# Altium PCB Mainboard-mbed.PcbDoc
Units mm, origin at the board's own origin, x right, y up, seen from the top; angles counter-clockwise.
Board outline 85 x 50 mm, 2 copper layers (Top Layer, Bottom Layer); 88 components, 113 nets, 414 pads, 292 vias.
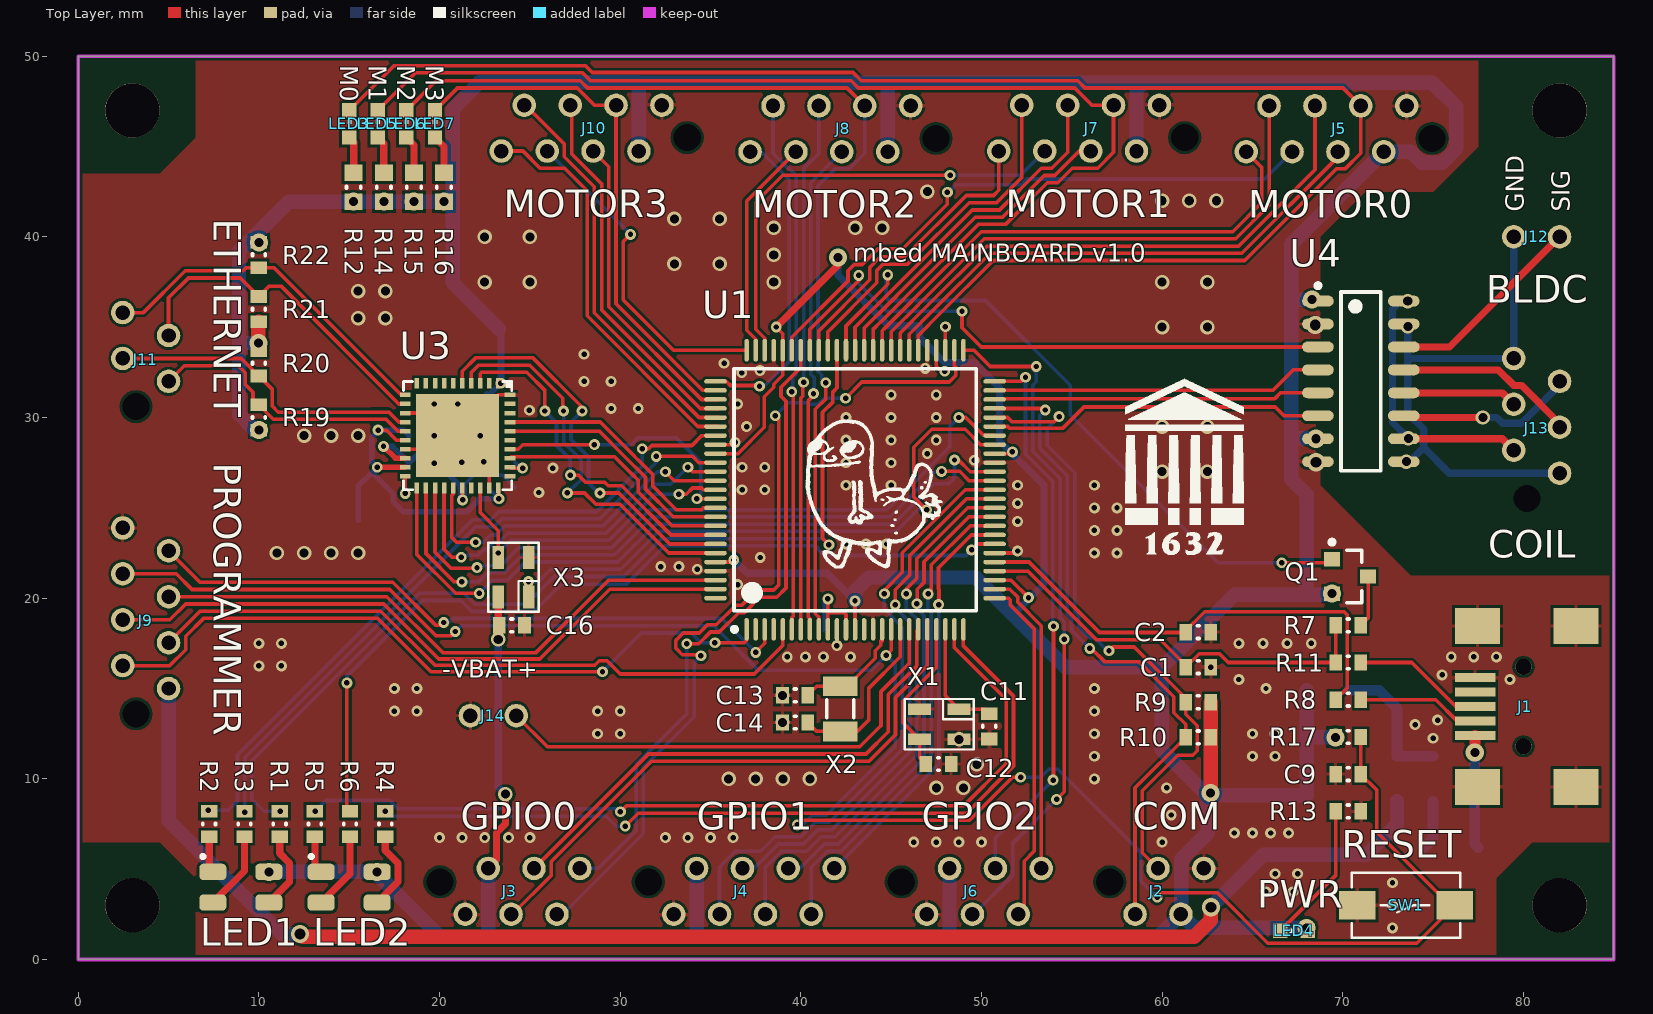
[diagram p0: Top Layer view]
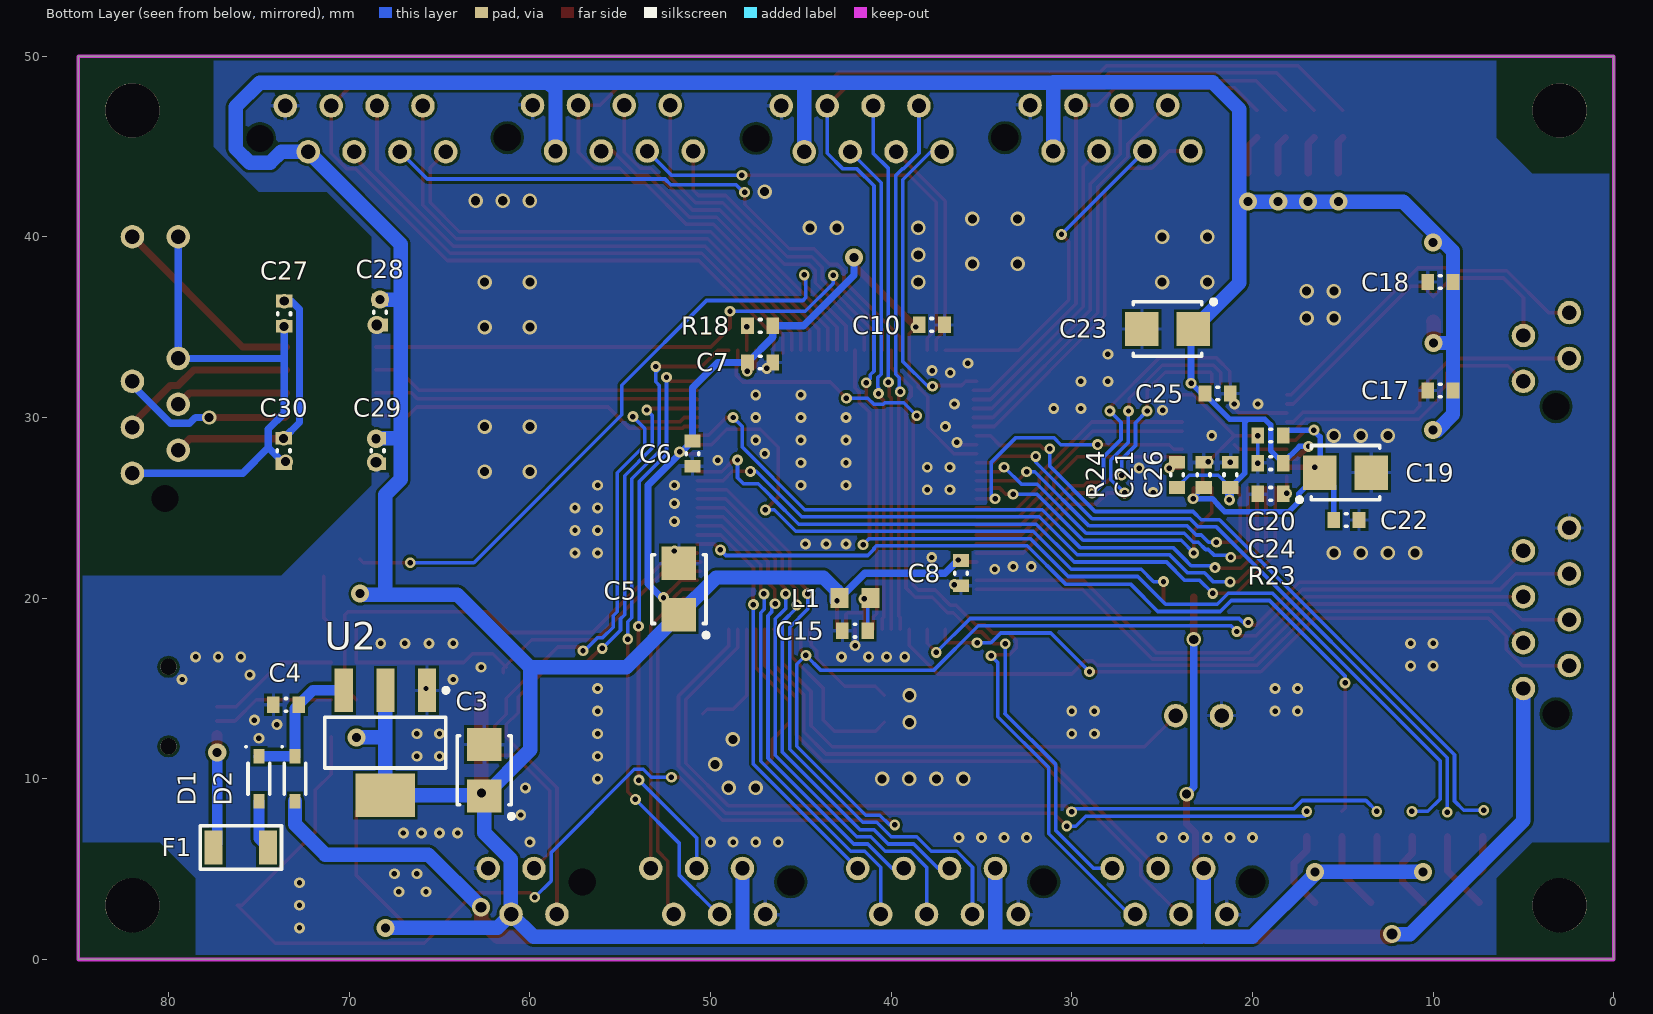
[diagram p1: Bottom Layer view, seen from below]

## Layer stack, top to bottom
Top Solder: solder mask 0.0102, Solder Resist, Dk 3.5
Top Layer: signal copper 0.0356
Dielectric1: dielectric 0.32, FR-4, Dk 4.8
Bottom Layer: signal copper 0.0356
Bottom Solder: solder mask 0.0102, Solder Resist, Dk 3.5

## Board outline
0,0 0,50 85,50 85,0

## Design rules (kind name [scope] priority, off if disabled: settings)
BoardOutlineClearance [All] p1: gap=0.2
Clearance [All] p1: gap=0.153
ComponentClearance [All] p1: gap=0.1 collisioncheckmode=3 verticalgap=0.1 showdistances=FALSE
FabricationTestPointUsage TestPointUsage [All] p1: valid=0 allowmultiple=FALSE
FabricationTestpoint Testpoint [All] p1: side=3 testpointundercomponent=TRUE minsize=1.016 maxsize=2.54 preferedsize=1.524 minholesize=0 maxholesize=1.016 preferedholesize=0.813 testpointgrid=0.025 allowsidetop=TRUE allowsidebottom=TRUE usegrid=TRUE gridtolerance=0
HoleSize [All] p1: absolutevalues=TRUE maxlimit=2.54 minlimit=0.3 maxpercent=80.000 minpercent=20.000
MinimumAnnularRing [All] p1: minimumring=0.15
PlaneConnect [All] p1: planeconnectstyle=Relief reliefexpansion=0.2 reliefentries=4 reliefconductorwidth=0.2 reliefairgap=0.15
PolygonConnect PolygonConnect_Vias [All vs IsVia] p1: connectstyle=Direct reliefconductorwidth=0.254 reliefentries=4 polygonreliefangle="90 Angle" airgapwidth=0.254
PolygonConnect [All] p2: connectstyle=Relief reliefconductorwidth=0.2 reliefentries=4 polygonreliefangle="90 Angle" airgapwidth=0.15
RoutingVias [All] p1: holewidth=0.4 width=0.7 viastyle="Through Hole" minholewidth=0.3 minwidth=0.6 maxholewidth=6.3 maxwidth=1.5
SilkToSilkClearance [All] p1: silktosilkclearance=0.2
SilkToSolderMaskClearance SilkscreenOverComponentPads [IsPad] p1: minsilkscreentomaskgap=0.254 clearancetoexposedcopper=TRUE
SolderMaskExpansion [All] p1: expansion=0.075
Width [All] p1: maxlimit=1 minlimit=0.152 preferedwidth=0.2 minimp=50.000000 maximp=50.000000 favimp=50.000000
23 further rules are at their usual default settings.

## Classes and differential pairs
component class CoilgunConnector: C27 C28 C29 C30 J12 J13 U4
component class Mainboard-mbed: C1 C2 C3 C4 C5 C6 C7 C8 C9 C10 C11 C12 C13 C14 C15 C? D1 D2 F1 J1 J2 J3 J4 J5 J6 J7 J8 J9 J10 J14 L1 LED1 LED2 LED3 LED4 LED5 LED6 LED7 Q1 R1 R2 R3 R4 R5 R6 R7 R8 R9 R10 R11 R12 R13 R14 R15 R16 R17 R18 SW1 U1 U2 X1 X2
component class U_Ethernet: C16 C17 C18 C19 C20 C21 C22 C23 C24 C25 C26 J11 R19 R20 R21 R22 R23 R24 U3 X3

## Components (designator, comment, footprint, x,y, rotation, side; value= is the part's Value field where it differs from the comment)
C1 "CAP0603" CAPC0603(1608)100_L 62,16.179 r0 top
C2 "CAP0603" CAPC0603(1608)100_L 62,18.118 r0 top
C3 "Tant 10uF" CAPMP3528X12N 62.525,10.475 r270 bottom
C4 "CAP0603" CAPC0603(1608)100_L 73.5,14.1 r180 bottom
C5 "Tant 10uF" CAPMP3528X12N 51.75,20.5 r270 bottom
C6 "100nF" CAPC0603(1608)100_L 51,28 r270 bottom
C7 "100nF" CAPC0603(1608)100_L 47.25,33.05 r180 bottom
C8 "100nF" CAPC0603(1608)100_L 36.135,21.385 r270 bottom
C9 "CAP0603" CAPC0603(1608)100_L 70.3,10.26 r180 top
C10 "100nF" CAPC0603(1608)100_L 37.75,35.13 r180 bottom
C11 "CAP0603" CAPC0603(1608)100_L 50.43,12.905 r270 top
C12 "CAP0603" CAPC0603(1608)100_L 47.62,10.825 r0 top
C13 "CAP0603" CAPC0603(1608)100_L 39.685,14.625 r180 top
C14 "CAP0603" CAPC0603(1608)100_L 39.685,13.125 r180 top
C15 "CAP0603" CAPC0603(1608)100_L 42,18.2 r180 bottom
C16 "100nF" CAPC0603(1608)100_L 24,18.5 r180 top
C17 "100nF" CAPC0603(1608)100_L 9.6,31.5 r180 bottom
C18 "100nF" CAPC0603(1608)100_L 9.6,37.5 r0 bottom
C19 "10uF Tant" CAPMP3528X12N 14.85,26.95 r0 bottom
C20 "100nF" CAPC0603(1608)100_L 19,29 r180 bottom
C21 "100nF" CAPC0603(1608)100_L 22.7,26.825 r90 bottom
C22 "100nF" CAPC0603(1608)100_L 14.8,24.325 r180 bottom
C23 "10uF Tant" CAPMP3528X12N 24.7,34.9 r180 bottom
C24 "100nF" CAPC0603(1608)100_L 19,27.475 r180 bottom
C25 "100nF" CAPC0603(1608)100_L 21.925,31.325 r0 bottom
C26 "100nF" CAPC0603(1608)100_L 21.225,26.825 r270 bottom
C27 "100nF" CAPC0603(1608)100_L 73.6,35.75 r90 bottom
C28 "100nF" CAPC0603(1608)100_L 68.3,35.825 r90 bottom
C29 "100nF" CAPC0603(1608)100_L 68.425,28.15 r270 bottom
C30 "100nF" CAPC0603(1608)100_L 73.625,28.15 r270 bottom
D1 "BAT60A" INF-SOD323_V 75,10 r180 bottom
D2 "BAT60A" INF-SOD323_V 73,10 r180 bottom
F1 "PTC-1206" PTC-1206 76,6.2 r180 bottom
J1 "USB-MINI-B" USB-B-MINI 80,14 r90 top
J2 "COM" MICRO-MATCH-4 58.5,2.5 r180 top
J3 "GPIO0" MICRO-MATCH-6 21.42,2.5 r180 top
J4 "GPIO1" MICRO-MATCH-8 32.96,2.5 r180 top
J5 "MOTOR0" MICRO-MATCH-8 73.54,47.25 r0 top
J6 "GPIO2" MICRO-MATCH-6 46.96,2.5 r180 top
J7 "MOTOR1" MICRO-MATCH-8 59.85,47.29 r0 top
J8 "MOTOR2" MICRO-MATCH-8 46.08,47.25 r0 top
J9 "PROGRAMMER" MICRO-MATCH-8 5,15 r270 top
J10 "MOTOR3" MICRO-MATCH-8 32.31,47.29 r0 top
J11 "ETHERNET" MICRO-MATCH-4 5,32 r270 top
J12 "BLDC" PIN-HEADER-2 79.46,40 r0 top
J13 "COIL" MICRO-MATCH-6 82,26.92 r270 top
J14 "-VBAT+" PIN-HEADER-2 24.25,13.5 r180 top
L1 "10uH" 0603 42,20 r0 bottom
LED1 "RGB-LED" RGB-LED 9,4 r0 top
LED2 "RGB-LED" RGB-LED 15,4 r0 top
LED3 "M0" CHIPLED_0603 15,46.25 r0 top
LED4 "PWR" CHIPLED_0603 67.3,1.6 r90 top
LED5 "M1" CHIPLED_0603 16.583,46.25 r0 top
LED6 "M2" CHIPLED_0603 18.167,46.25 r0 top
LED7 "M3" CHIPLED_0603 19.75,46.25 r0 top
Q1 "BSS84LT1G" ONSC-SOT-23-3-318-08_V 70.4,21.2 r0 top
R1 "100R" RESC0603(1608)_L 11.15,7.5 r90 top
R2 "470R" RESC0603(1608)_L 7.25,7.5 r270 top
R3 "100R" RESC0603(1608)_L 9.2,7.5 r90 top
R4 "100R" RESC0603(1608)_L 17,7.5 r90 top
R5 "470R" RESC0603(1608)_L 13.1,7.5 r270 top
R6 "100R" RESC0603(1608)_L 15.05,7.5 r90 top
R7 "RES0603" RESC0603(1608)_L 70.3,18.5 r0 top
R8 "RES0603" RESC0603(1608)_L 70.3,14.38 r0 top
R9 "10K" RESC0603(1608)_L 62,14.239 r0 top
R10 "10K" RESC0603(1608)_L 62,12.3 r0 top
R11 "RES0603" RESC0603(1608)_L 70.3,16.44 r0 top
R12 "470R" RESC0603(1608)_N 15.25,42.75 r90 top
R13 "470R" RESC0603(1608)_L 70.3,8.2 r0 top
R14 "470R" RESC0603(1608)_N 16.917,42.75 r90 top
R15 "470R" RESC0603(1608)_N 18.583,42.75 r90 top
R16 "470R" RESC0603(1608)_N 20.25,42.75 r90 top
R17 "RES0603" RESC0603(1608)_L 70.3,12.32 r180 top
R18 "RES0603" RESC0603(1608)_L 47.25,35.075 r180 bottom
R19 "49R9" RESC0603(1608)_L 10,30 r90 top
R20 "49R9" RESC0603(1608)_L 10,33 r90 top
R21 "49R9" RESC0603(1608)_L 10,36 r90 top
R22 "49R9" RESC0603(1608)_L 10,39 r90 top
R23 "4K87" RESC0603(1608)_L 19,25.775 r0 bottom
R24 "2K2" RESC0603(1608)_L 24.175,26.825 r90 bottom
SW1 "RESET" DTSM-32S-B 73.5,3 r180 top
U1 "LPC1768FBD100" SOT407-1_L 43,26 r90 top
U2 "LD1117S33CTR" SOT-223_N 68,12 r270 bottom
U3 "DP83848J" LLP-40 21,29 r0 top
U4 "Si8641BC-B-IS1" SLAB-SOIC-16-NB_L 71,32 r0 top
X1 "12MHz" 3.2X.2.5 47.665,13.02 r180 top
X2 "32.768kHz" FC135 42.185,13.875 r90 top
X3 "50MHz" 3.2X.2.5 24.088,21.158 r90 top

## Footprints (in the part's own frame and the unit in brackets; to place one, negate y for a bottom-side part, rotate by r counter-clockwise, add the part's x,y. Pads: shape width x height; smd on the part's side, far side on the other; paste and mask are expansions set on the pad)
3.2X.2.5 [mil]
  rect 50x25 smd: P$1(-43,-33) P$2(43,-33) P$3(43,33) P$4(-43,33)
  silkscreen extent -75,-55 75,55
0603 [mm]
  rect 1x1.1 smd: 1(-0.85,0) 2(0.85,0)
CAPC0603(1608)100_L [mm]
  rect 0.7x0.9 smd: 1(-0.7,0) 2(0.7,0)
  silkscreen extent -0.05,-0.35 0.05,0.35, body extent -0.87,-0.47 0.88,0.48, height 1
CAPMP3528X12N [mm] "Molded Capacitor, 2-Leads, Body 3,50x2,80mm, IPC Medium Density"
  rect 1.85x1.9 smd: 1(-1.425,0) 2(1.425,0)
  silkscreen extent -1.9,-1.5 2.67,1.62, body extent -2.07,-1.5 2.07,1.5, height 1.2
CHIPLED_0603 [mil]
  rect 31.5x31.5 smd: A(0,-29.53) C(0,29.53)
  silkscreen extent -5,0 5,10
DTSM-32S-B [mm]
  rect 2x1.6 smd: P$1(-2.7,0) P$2(2.7,0)
  silkscreen extent -3,-1.8 3,1.8
FC135 [mm]
  rect 1.1x1.9 smd: X1(-1.25,0) X2(1.25,0)
  silkscreen extent -0.5,-0.75 0.5,0.75
INF-SOD323_V [mm] "SOD, 2-Leads, Body 1.7x1.25 mm"
  rect 0.6x0.8 smd: 1(0,1.25) 2(0,-1.25)
  silkscreen extent -0.76,-0.85 0.6,1.83, body extent -0.63,-0.85 0.63,0.85, height 1.1
LLP-40 [mm]
  rect 0.25x0.6 smd: 1(2.25,2.9) 2(1.75,2.9) 3(1.25,2.9) 4(0.75,2.9) 5(0.25,2.9) 6(-0.25,2.9) 7(-0.75,2.9) 8(-1.25,2.9) 9(-1.75,2.9) 10(-2.25,2.9) 21(-2.25,-2.9) 22(-1.75,-2.9) 23(-1.25,-2.9) 24(-0.75,-2.9) 25(-0.25,-2.9) 26(0.25,-2.9) 27(0.75,-2.9) 28(1.25,-2.9) 29(1.75,-2.9) 30(2.25,-2.9)
  rect 0.6x0.25 smd: 11(-2.9,2.25) 12(-2.9,1.75) 13(-2.9,1.25) 14(-2.9,0.75) 15(-2.9,0.25) 16(-2.9,-0.25) 17(-2.9,-0.75) 18(-2.9,-1.25) 19(-2.9,-1.75) 20(-2.9,-2.25) 31(2.9,-2.25) 32(2.9,-1.75) 33(2.9,-1.25) 34(2.9,-0.75) 35(2.9,-0.25) 36(2.9,0.25) 37(2.9,0.75) 38(2.9,1.25) 39(2.9,1.75) 40(2.9,2.25)
  rect 4.6x4.6 smd: DAP(0,0)
  silkscreen extent -3,-3 3,3
MICRO-MATCH-4 [mm]
  round 1.3 hole 0.8: 1(0,0) 2(-1.27,-2.54) 3(-2.54,0) 4(-3.81,-2.54)
  round 0 hole 1.5 unplated: drill(1.4,-1.8)
  body extent -5.41,-3.77 1.6,1.23, height 4
MICRO-MATCH-6 [mm]
  round 1.3 hole 0.8: 1(0,0) 2(-1.27,-2.54) 3(-2.54,0) 4(-3.81,-2.54) 5(-5.08,0) 6(-6.35,-2.54)
  round 0 hole 1.5 unplated: drill(1.4,-1.8)
  body extent -7.95,-3.77 1.6,1.23, height 4
MICRO-MATCH-8 [mm]
  round 1.3 hole 0.8: 1(0,0) 2(-1.27,-2.54) 3(-2.54,0) 4(-3.81,-2.54) 5(-5.08,0) 6(-6.35,-2.54) 7(-7.62,0) 8(-8.89,-2.54)
  round 0 hole 1.5 unplated: drill(1.4,-1.8)
  body extent -10.49,-3.77 1.6,1.23, height 4
ONSC-SOT-23-3-318-08_V [mm] "SOT23, 3-Leads, Body 2.92x1.3mm, Pitch 0.95mm"
  rect 0.9x0.8 smd: 1(-1,0.95) 2(-1,-0.95) 3(1,0)
  silkscreen extent -1.12,-1.46 0.65,2.02, body extent -0.65,-1.46 0.65,1.46, height 1.11
PIN-HEADER-2 [mm]
  round 1.3 hole 0.8: 1(0,0) 2(2.54,0)
PTC-1206 [mm]
  rect 1x1.9 smd: 1(-1.5,0) 2(1.5,0)
  silkscreen extent -2.25,-1.2 2.25,1.2
RESC0603(1608)_L [mm] "Chip Resistor, Body 1.6x0.8mm, IPC High Density"
  rect 0.7x0.9 smd: 1(-0.7,0) 2(0.7,0)
  silkscreen extent -0.05,-0.35 0.05,0.35, body extent -0.85,-0.47 0.85,0.47, height 0.6
RESC0603(1608)_N [mm] "Chip Resistor, Body 1.6x0.8mm, IPC Medium Density"
  rect 0.9x1 smd: 1(-0.8,0) 2(0.8,0)
  silkscreen extent -0.05,-0.4 0.05,0.4, body extent -0.85,-0.47 0.85,0.47, height 0.6
RGB-LED [mm] "WURTH ELEKTRONIK 150141M173100"
  rrect50% 1.5x0.9 smd: 1(1.55,0.85) 2(1.55,-0.85) 3(-1.55,0.85) 4(-1.55,-0.85)
  silkscreen extent -2.2,1.6 -2,1.8, body extent -1.75,-1.4 1.75,1.4, height 1.91
SLAB-SOIC-16-NB_L [mm] "SOIC, 16-Leads, Body 9.9x3.9mm, Pitch 1.27mm, IPC High Density"
  oval 1.75x0.6 smd: 1(-2.375,4.445) 2(-2.375,3.175) 3(-2.375,1.905) 4(-2.375,0.635) 5(-2.375,-0.635) 6(-2.375,-1.905) 7(-2.375,-3.175) 8(-2.375,-4.445) 9(2.375,-4.445) 10(2.375,-3.175) 11(2.375,-1.905) 12(2.375,-0.635) 13(2.375,0.635) 14(2.375,1.905) 15(2.375,3.175) 16(2.375,4.445)
  silkscreen extent -2.5,-4.95 1.1,5.42, body extent -1.95,-4.95 1.95,4.95, height 1.75
SOT407-1_L [mm] "Thin QFP, 100-Leads, Body 14x14mm, Pitch 0.5mm, IPC High Density"
  oval 1.25x0.25 smd: 1(-7.725,6) 2(-7.725,5.5) 3(-7.725,5) 4(-7.725,4.5) 5(-7.725,4) 6(-7.725,3.5) 7(-7.725,3) 8(-7.725,2.5) 9(-7.725,2) 10(-7.725,1.5) 11(-7.725,1) 12(-7.725,0.5) 13(-7.725,0) 14(-7.725,-0.5) 15(-7.725,-1) 16(-7.725,-1.5) 17(-7.725,-2) 18(-7.725,-2.5) 19(-7.725,-3) 20(-7.725,-3.5) 21(-7.725,-4) 22(-7.725,-4.5) 23(-7.725,-5) 24(-7.725,-5.5) 25(-7.725,-6) 51(7.725,-6) 52(7.725,-5.5) 53(7.725,-5) 54(7.725,-4.5) 55(7.725,-4) 56(7.725,-3.5) 57(7.725,-3) 58(7.725,-2.5) 59(7.725,-2) 60(7.725,-1.5) 61(7.725,-1) 62(7.725,-0.5) 63(7.725,0) 64(7.725,0.5) 65(7.725,1) 66(7.725,1.5) 67(7.725,2) 68(7.725,2.5) 69(7.725,3) 70(7.725,3.5) 71(7.725,4) 72(7.725,4.5) 73(7.725,5) 74(7.725,5.5) 75(7.725,6)
  oval 0.25x1.25 smd: 26(-6,-7.725) 27(-5.5,-7.725) 28(-5,-7.725) 29(-4.5,-7.725) 30(-4,-7.725) 31(-3.5,-7.725) 32(-3,-7.725) 33(-2.5,-7.725) 34(-2,-7.725) 35(-1.5,-7.725) 36(-1,-7.725) 37(-0.5,-7.725) 38(0,-7.725) 39(0.5,-7.725) 40(1,-7.725) 41(1.5,-7.725) 42(2,-7.725) 43(2.5,-7.725) 44(3,-7.725) 45(3.5,-7.725) 46(4,-7.725) 47(4.5,-7.725) 48(5,-7.725) 49(5.5,-7.725) 50(6,-7.725) 76(6,7.725) 77(5.5,7.725) 78(5,7.725) 79(4.5,7.725) 80(4,7.725) 81(3.5,7.725) 82(3,7.725) 83(2.5,7.725) 84(2,7.725) 85(1.5,7.725) 86(1,7.725) 87(0.5,7.725) 88(0,7.725) 89(-0.5,7.725) 90(-1,7.725) 91(-1.5,7.725) 92(-2,7.725) 93(-2.5,7.725) 94(-3,7.725) 95(-3.5,7.725) 96(-4,7.725) 97(-4.5,7.725) 98(-5,7.725) 99(-5.5,7.725) 100(-6,7.725)
  silkscreen extent -7.85,-6.7 6.7,6.8, body extent -7,-7 7,7, height 1.6
SOT-223_N [mm] "SOT223, 4-Leads, Body 6.5x3.5mm, Pitch 2.3mm, Lead Span 7mm, IPC Medium Density"
  rect 2.4x1 smd: 1(-2.9,2.3) 2(-2.9,0) 3(-2.9,-2.3)
  rect 2.4x3.3 smd: 4(2.9,0)
  silkscreen extent -3.02,-3.35 1.4,3.47, body extent -1.85,-3.35 1.85,3.35, height 1.8
USB-B-MINI [mm]
  round 0.9 hole 0.9 unplated: 0(-2.2,0) 0(2.2,0)
  rect 0.5x2.25 smd: 1(-1.6,2.675) 2(-0.8,2.675) 3(0,2.675) 4(0.8,2.675) 5(1.6,2.675)
  rect 2x2.5 smd: 6(-4.45,2.55) 7(4.45,2.55) 8(4.45,-2.9) 9(-4.45,-2.9)
  body extent -4.95,-5.9 4.95,3.3, height 4.15

## Part data
C1 C2 C4 C9 C11 C12 C13 C14 C15: library part CMP-1590-00005-1, "0603 (1608 Metric) Chip Capacitor"
C3 C5 C19 C23: library part cap_pol
C6 C7 C8 C10 C27 C28 C29 C30: library part CMP-1035-02579-1, "CAP 100nF 10V ±5% 0603 (1608 Metric) Thickness 1mm SMD"
C16 C17 C18 C20 C21 C22 C24 C25 C26: library part CMP-1035-02575-1, "CAP 100nF 6.3V ±5% 0603 (1608 Metric) Thickness 1mm SMD"
D1 D2: library part CMP-1183-00008-2, "Silicon Schottky Diode, -55 to 85 degC, SOD323, Reel, Green"
J1: library part USB-B-MINI
J2 J11: library part HEADER-4
J3 J6 J13: library part HEADER-6
J4 J5 J7 J8 J9 J10: library part HEADER-8
J12 J14: library part HEADER-2
L1: library part L
LED3 LED4 LED5 LED6 LED7: library part LED0603
Q1: library part CMP-1058-00762-1, "Power MOSFET Single P-Channel, -50 V, 10 Ohm, 3-Pin SOT-23, Pb-Free, Tape and Reel"
R1 R3 R4 R6: library part CMP-1012-00050-1
R2 R5 R12 R13 R14 R15 R16: library part CMP-1012-00066-1, "470R 0.1W 5% 0603 (1608 Metric)  SMD"
R7 R8 R11 R17 R18: library part CMP-1591-00001-1, "0603 (1608 Metric) Chip Resistor"
R9 R10: library part CMP-1012-00098-1
R19 R20 R21 R22: library part CMP-1012-00363-1, "49R9 0.1W 1% 0603 (1608 Metric)  SMD"
R23: library part CMP-1012-00588-1, "4K87 0.1W 1% 0603 (1608 Metric)  SMD"
R24: library part CMP-1012-00546-1, "2K2 0.1W 1% 0603 (1608 Metric)  SMD"
SW1: library part SPST
U1: library part CMP-0174-00010-4, "Cortex-M3, 32-Bit ARM MCU, 512 kB flash, 64 kB SRAM, Ethernet, USB 2.0 Device/Host/OTG, 12-Bit ADC, DAC, I2S, 100-Pin LQFP"
U2: library part CMP-0244-00307-1, "Fixed Low Drop Positive Voltage Regulator, 3.3V, 4-Pin SOT-223, Tape and Reel"
U4: library part CMP-0512-00190-1, "Low-Power Quad-Channel Digital Isolator, 150 Mbps, 3.75 kVRMS Isolation Rating, -40 to 125 degC, 16-pin SOIC"
X1: library part Q_3.2X2.5
X2: library part Q_FC135
X3: library part OSCILLATOR

## Free pads (board coordinates)
  round 3 hole 3 unplated: 0(3,47) 1(82,47) 2(82,3) 3(3,3)

## Via types
v1: diameter 0.6, hole 0.3, Top Layer to Bottom Layer, 218 vias
v2: diameter 0.8, hole 0.5, Top Layer to Bottom Layer, 53 vias
v3: diameter 1, hole 0.5, Top Layer to Bottom Layer, 17 vias
v4: diameter 1, hole 0.6, Top Layer to Bottom Layer, 4 vias

## Nets (pads, with @x,y where several pads share a name; then routed paths per layer and width w, separated by ;. In a path a pad name is that pad's centre, name@x,y a point inside that pad or via, vN(x,y) a via of type N, cw(c..) or ccw(c..) an arc to the next point about the centre after c; other vN are vias at no path point)
3V3: C3.2 C5.2 C6.1 C7.1 C8.1 C10.1 C16.2 C17.2 C18.1 C23.2 C24.2 C25.2 C26.2 C28.2 C29.1 J2.3 J3.2 J4.2 J5.2 J6.2 J7.2 J8.2 J10.2 L1.2 LED1.1 LED2.1 LED4.A Q1.2 R9.2 R10.2 R12.1 R14.1 R15.1 R16.1 R17.2 R18.2 R19.1 R20.2 R21.1 R22.2 R24.1 U1.13 U1.28 U1.42 U1.54 U1.71 U1.84 U1.96 U2.2 U2.4 U3.1 U3.18 U3.26 U4.1 U4.7 X3.P$4 | length 375.2
  Top Layer w0.2: U3.26 21.275,26.075 v1(21.275,25.443) ; U1.96 36.169,22 v1(36.284,22.116) ; U1.84 36.522,28 37.977,29.455 37.977,29.523 37.98,29.52 37.98,31.15 38.5,31.67 38.5,31.839 39,32.339 U1.71 39,34.645 v1(38.635,35.01) ; U1.13 v1(43,19.85) ; U1.54 47.5,32.84 47.775,32.565 v1(47.965,32.565) ; U1.28 51.634,21 v1(52.6,20.034) ; U1.42 51.609,28 v1(51.708,28.099)
  Top Layer w0.3: v1(16.9,28.4) 17.55,27.75 U3.18
  Top Layer w0.4: J3.2 23.153,5.503 23.153,7.02 23.65,7.517 v2(23.65,9.15) ; v2(23.25,17.725) 23.25,18.45 C16.2 23.25,18.55 X3.P$4 ; v1(38.635,35.01) 42.055,38.43 v3(42.055,38.86)
  Top Layer w0.8: v3(9.975,34.125) 9.975,35.275 R21.1 ; v3(62.675,9.215) 62.7,9.19 R10.2 R9.2
  Bottom Layer w0.2: C26.2 21.9,26.8 23.5,26.8 R24.1 ; C25.2 C25.2@22.825,31.325 ; v1(36.284,22.116) 36.284,22.189 C8.1@36.415,22.32 ; v1@51.655,28.075 51.684,28.075 v1(51.708,28.099) ; C5.2@52.6,19.925 v1(52.6,20.034)
  Bottom Layer w0.3: v1(16.9,28.4) 17.4,28.4 18.3,27.5 C24.2 19,28.175 19,29.595 19.305,29.9 20.277,29.9 ; C26.2 20.426,26.924 20.426,27.029 20.425,27.03 20.425,28.02 20.426,28.021 20.426,29.751 20.277,29.9 ; v1@21.243,25.443 v1(21.275,25.443) ; C25.2 22.625,31.276 21.349,30 21.249,29.9 20.277,29.9 ; C25.2@22.825,31.325 v1(23.4,31.9)
  Bottom Layer w0.4: v2(23.25,17.725) 23.247,17.722 23.247,9.553 v2(23.65,9.15) ; C23.2 23.4,34.775 v1(23.4,31.9) ; v1(36.284,22.116) 37.015,21.385 41.465,21.385 L1.2 v1(43,19.85) ; v3(42.055,38.86) 42.055,37.87 44.85,35.075 R18.2 46.55,34.45 C7.1 49.595,33.05 51,31.645 C6.1 53.455,26.245 53.455,20.78 52.6,19.925 C5.2
  Bottom Layer w0.5: C26.2 21.275,26.075 v1(21.275,25.443)
  Bottom Layer w0.8: 9.275,34.125 v3(9.975,34.125) ; v3(10,29.3) 9.825,29.3 9.8,29.275 8.9,30.175 C17.2 C18.1 8.9,39.2 v3@9.625,39.925 ; v3(10,39.7) 9.85,39.7 v3@9.625,39.925 ; v3(10.55,4.85) v3(16.55,4.85) 16.55,4.725 20.025,1.25 22.555,1.25 22.69,1.385 ; v3(20.25,41.95) v3(18.575,41.95) v3(16.917,41.95) v3(15.25,41.95) 11.65,41.95 v3@9.625,39.925 ; J3.2 22.69,1.385 ; C23.2 20.725,37.45 20.725,41.95 20.725,47.075 22.21,48.56 31.04,48.56 31.04,48.265 ; J10.2 31.04,48.265 ; J4.2 34.23,1.37 34.35,1.25 ; v1(43,19.85) 43,20.4 43.745,21.145 49.68,21.145 C5.2 54.66,16.165 59.975,16.165 ; J8.2 44.815,44.715 44.815,48.54 ; J6.2 48.23,1.355 48.125,1.25 ; J7.2 58.58,48.13 58.99,48.54 ; v3(68,1.75) 61.79,1.75 J2.3 ; U2.2 68,12.325 ; v3(68.3,36.525) 67.175,36.525 67.15,36.5 ; C29.1 67.175,28.85 67.15,28.825 ; v3(69.4,20.25) 69.35,20.2 68,20.2 ; v3(69.6,12.3) 68.025,12.3 68,12.325 ; 22.69,1.385 22.825,1.25 34.35,1.25 ; 31.04,48.265 31.315,48.54 44.815,48.54 ; 34.35,1.25 48.125,1.25 ; 44.815,48.54 58.99,48.54 ; 48.125,1.25 59.79,1.25 J2.3 ; 58.99,48.54 74.96,48.54 76.29,47.21 76.29,44.891 75.499,44.1 74.381,44.1 73.771,44.71 J5.2 67.15,39.59 67.15,36.5 ; 59.975,16.165 64.01,20.2 68,20.2 ; 59.975,16.165 59.975,11.6 C3.2 ; J2.3 61.06,2.52 61.06,5.558 62.525,7.023 C3.2 ; C3.2 62.575,9.1 U2.4 68,12.325 ; 67.15,28.825 67.15,36.5 ; 67.15,28.825 67.15,26.575 68,25.725 68,20.2
  other v3: 68.525,28.825
5V: C27.2 C30.1 J13.2 U4.10 U4.16 | length 14.9
  Top Layer w0.4: U4.10@73.475,28.825 78.825,28.825 J13.2 ; U4.16@73.475,36.445 v2(73.595,36.445)
  Bottom Layer w0.4: C27.2 v2(73.595,36.445) 73.195,36.445 72.75,36 72.75,29.725 v2(73.625,28.85)
50MHZ: U1.88 U3.28 X3.P$3 | length 17.6
  Top Layer w0.2: U3.28 22.25,24.74 23.25,23.74 v1(23.25,22.5) ; v1(33.25,25.75) 33.651,25.75 34.001,26.1 34.498,26.1 34.598,26 U1.88
  Bottom Layer w0.2: v1(23.25,22.5) 23.95,23.2 29.376,23.2 31.926,25.75 v1(33.25,25.75)
ADC0: J3.3 U1.21 | length 32.4
  Top Layer w0.2: J3.3 24.034,2.5 26.18,4.646 26.18,5.424 31.731,10.975 43.775,10.975 45.238,12.438 45.238,14.498 47,16.26 U1.21
ADC1: J3.4 U1.20 | length 29.1
  Top Layer w0.2: J3.4 31.565,11.375 43.609,11.375 44.838,12.603 44.838,14.663 46.425,16.251 46.425,18.2 U1.20
C_CHARGE: U1.48 U4.5 | length 18
  Top Layer w0.2: U1.48@50.74,30.985 U1.48 50.755,31.03 66.215,31.03 66.55,31.365 U4.5@68.525,31.365
C_DONE: U1.45 U4.6 | length 18.5
  Top Layer w0.2: U1.45 51.457,29.5 51.542,29.415 54.51,29.415 55.675,30.58 66.255,30.58 66.74,30.095 U4.6@68.525,30.095
C_KICK: U1.49 U4.4 | length 18.3
  Top Layer w0.2: U1.49 66.119,31.5 67.254,32.635 U4.4@68.525,32.635
D+: C1.1 R7.1 R11.1 U1.29 | length 24.3
  Top Layer w0.2: U1.29@50.55,21.5 U1.29 52.564,21.5 56.364,17.7 59.9,17.7 C1.1@61.361,16.239 ; C1.1 C1.1@61.361,16.239 ; C1.1@61.476,15.879 61.476,16.124 C1.1@61.361,16.239 ; R7.1 R11.1 63.663,16.44 63.174,16.929 62.05,16.929 C1.1@61.361,16.239
D-: C2.1 R8.1 U1.30 | length 26.8
  Top Layer w0.2: U1.30@50.55,22 52.629,22 56.529,18.1 61.2,18.1 62.35,19.25 70.074,19.25 70.25,19.074 70.25,15.03 R8.1
GND: C1.2 C2.2 C3.1 C4.1 C5.1 C6.2 C7.2 C8.2 C9.2 C10.2 C11.2 C12.2 C13.2 C14.2 C15.1 C16.1 C17.1 C18.2 C19.1 C20.1 C21.2 C22.2 C23.1 C24.1 C25.1 C26.1 C28.1 C29.2 J1.5 J1.6 J1.7 J1.8 J1.9 J2.4 J3.1 J4.1 J5.1 J6.1 J7.1 J8.1 J9.8 J10.1 J14.2 R13.2 R23.2 SW1.P$2 U1.11 U1.15 U1.31 U1.41 U1.55 U1.72 U1.83 U1.97 U2.1 U3.13 U3.17 U3.29 U3.40 U3.DAP U4.2 U4.8 X1.P$2 X1.P$4 X3.P$2 | length 19.9
  Top Layer w0.2: U3.17 20.75,28.25 U3.DAP@21,28.5 ; U3.13 20.75,30.25 U3.DAP@21,30.5 ; U3.DAP@19.776,29.001 U3.DAP@20.999,29.001 ; U3.29 22.75,27.25 v1(22.45,27.55) U3.DAP U3.DAP@20.999,29.001 ; U3.40 23.25,31.25 21.001,29.001 U3.DAP@20.999,29.001 ; U1.83 36.24,28.5 v1(36.365,28.625) ; v1(41.995,17.375) 42,17.38 U1.11 ; U1.31 51.89,22.5 v1(52,22.61) ; v4(68.475,35.125) U4.2@68.525,35.175 ; v4(68.525,27.525) U4.8@68.525,27.555
  Bottom Layer w0.2: v1(19.7,27.475) v1(19.7,29) ; C28.1 v4(68.475,35.125) ; C29.2@68.5,27.5 v4(68.525,27.525)
  other v1: 72.75,1.75 72.75,3 65.75,3.75 67.25,3.75 72.75,4.25 66.25,4.75 67.5,4.75 46.25,6.5 47.5,6.5 48.75,6.5 50,6.5 60,6.5 20,6.75 21.25,6.75 22.5,6.75 23.826,6.75 25,6.75 32.5,6.75 33.75,6.75 35,6.75 36.25,6.75 64,7 65,7 66,7 67,7 60.5,8 60.25,9.5 56.25,10 56.25,11.25 65,11.25 66.25,11.25 75,12.25 28.75,12.5 30,12.5 56.25,12.5 65,12.5 66.25,12.5 74,13 75.25,13.25 17.5,13.75 18.75,13.75 28.75,13.75 30,13.75 56.25,13.75 17.5,15 18.75,15 56.25,15 65.75,15 64.25,15.5 79.25,15.5 75.5,15.75 62.7,16.179 10,16.25 11.25,16.25 39.25,16.75 40.25,16.75 41.25,16.75 42.75,16.75 76,16.75 77.25,16.75 78.5,16.75 10,17.5 11.25,17.5 64.25,17.5 65.583,17.5 66.917,17.5 68.25,17.5 36.5,20.75 34.265,21.6 32.25,21.75 33.25,21.75 37.75,22.25 56.25,22.5 57.5,22.5 42.5,23 43.6,23 44.75,23 56.25,23.75 57.5,23.75 52,24.25 56.25,25 57.5,25 52,25.25 25.5,25.85 36.75,26 38,26 42.5,26.25 45,26.25 52,26.25 56.25,26.25 26.275,27.2 36.75,27.25 38,27.25 42.5,27.5 45,27.5 21.225,27.525 49.595,27.635 47,28 42.5,28.75 45,28.75 47.5,28.75 22.25,29 37,29.5 42.5,30 45,30 47.5,30 24.975,30.4 29.5,30.5 31,30.5 19.7,30.75 21,30.75 36.5,30.75 45,31.25 47.5,31.25 28,32 29.5,32 36.725,32.475 37.735,32.598 46.89,32.72 35.75,33 28,33.5
  other v2: 47.5,9.5 49,9.5 36,10 37.5,10 39,10 40.5,10 49.745,10.8 48.757,12.182 38.985,13.125 38.985,14.625 11,22.5 12.5,22.5 14,22.5 15.5,22.5 60,27 62.5,27 12.5,29 14,29 15.5,29 60,29.5 62.5,29.5 60,35 62.5,35 15.5,35.5 17,35.5 15.5,37 17,37 22.5,37.5 25,37.5 38.5,37.5 60,37.5 62.5,37.5 33,38.5 35.5,38.5 38.5,39 22.5,40 25,40 38.5,40.5 43,40.5 44.5,40.5 33,41 35.5,41 60,42 61.5,42 63,42 47,42.5
GND2: C27.1 C30.2 J12.1 J13.1 J13.6 U4.9 U4.15 | length 29.4
  Top Layer w0.4: U4.9@73.475,27.555 v2(73.52,27.555) ; U4.15@73.475,35.175 v2(73.6,35.05)
  Bottom Layer w0.4: v2(73.6,35.05) 73.6,33.25 ; C30.2 v2(73.52,27.555) 73.6,27.635 73.776,27.635 74.475,28.334 ; J12.1 J13.6 73.62,33.27 73.6,33.25 ; J13.1 75.889,26.92 74.475,28.334 ; 73.6,33.25 73.6,30.241 74.475,29.366 74.475,28.334
LED1B: R1.2 U1.65 | length 52.9
  Top Layer w0.2: v1(41.55,22.96) 41.2,23.31 41.2,30.284 41.775,30.859 41.775,31.415 42,31.64 U1.65
  Bottom Layer w0.2: v1(11.175,8.2) 10.29,8.2 9.615,8.875 9.615,10.998 18.887,20.27 21.346,20.27 21.951,19.665 24.81,19.665 26.345,21.2 30.205,21.2 32.305,23.3 41.21,23.3 v1(41.55,22.96)
LED1G: R3.2 U1.85 | length 36.4
  Top Layer w0.2: R3.2 9.215,8.185 v1(9.215,8.15) ; v1(32,27.85) 33.999,27.85 34.349,27.5 U1.85
  Bottom Layer w0.2: v1(9.215,8.15) 9.215,11.164 21.995,23.943 22.996,23.943 23.453,24.4 28.879,24.4 32,27.521 v1(32,27.85)
LED1R: R2.1 U1.82 | length 38.7
  Top Layer w0.2: v1(31.225,28.27) 31.571,28.27 31.751,28.45 33.97,28.45 34.52,29 U1.82
  Bottom Layer w0.2: v1(7.195,8.26) 8.3,8.26 8.815,8.775 8.815,11.329 21.829,24.343 22.83,24.343 23.287,24.8 28.713,24.8 31.225,27.311 v1(31.225,28.27)
LED2B: R4.2 U1.25 | length 45.3
  Top Layer w0.2: v1(30.28,7.38) 31,8.1 49.165,8.1 51.77,10.705 51.77,14.58 49,17.35 U1.25
  Bottom Layer w0.2: v1(17,8.2) 17,8.03 17.095,7.935 29.235,7.935 29.79,7.38 v1(30.28,7.38)
LED2G: R6.2 U1.32 | length 47.4
  Top Layer w0.2: v1(14.875,15.31) 14.875,8.375 R6.2 ; v1(49.455,22.67) 49.785,23 U1.32
  Bottom Layer w0.2: v1(14.875,15.31) 14.875,15.692 19.053,19.87 21.181,19.87 21.786,19.265 25.239,19.265 26.754,20.78 30.35,20.78 32.47,22.9 40.82,22.9 40.95,22.77 40.95,22.711 41.301,22.36 49.145,22.36 v1(49.455,22.67)
LED2R: R5.1 U1.24 | length 48.5
  Top Layer w0.2: R5.1 v1(13.12,8.2) ; v1(30.015,8.18) 30.335,8.5 48.999,8.5 51.37,10.871 51.37,14.395 48.5,17.265 U1.24
  Bottom Layer w0.2: v1(13.12,8.2) 13.72,8.8 17.249,8.8 17.714,8.335 29.86,8.335 v1(30.015,8.18)
M0_DIR1: J5.4 U1.57 | length 29.1
  Top Layer w0.2: U1.57@46,33.55 U1.57 46,34.609 47.321,35.93 ; 47.321,35.932 50.479,39.09 64.399,39.09 69.73,44.421 J5.4
M0_DIR2: J5.5 U1.58 | length 31.3
  Top Layer w0.2: U1.58 45.5,34.675 46.921,36.096 ; 46.921,36.097 50.314,39.49 64.234,39.49 68.46,43.716 J5.5
  Bottom Layer w0.2: J5.5@68.386,47.25 J5.5
M0_ENCA: J5.7 U1.59 | length 30.4
  Top Layer w0.2: U1.59 45,34.741 46.521,36.262 ; 46.521,36.263 50.148,39.89 64.068,39.89 65.92,41.742 J5.7
  Bottom Layer w0.2: J5.7@65.846,47.25 J5.7
M0_ENCB: J5.8 U1.60 | length 28.2
  Top Layer w0.2: U1.60 44.5,34.808 44.597,34.904 ; 44.598,34.904 46.121,36.428 ; 46.121,36.429 49.982,40.29 63.902,40.29 65.52,41.908 65.52,43.84 J5.8
M0_FAULT: J5.3 LED3.C U1.56 | length 90.1
  Top Layer w0.2: LED3.C 17.475,49.475 28.086,49.475 28.46,49.1 42.891,49.1 43.351,48.64 55.329,48.64 55.729,48.24 70.01,48.24 J5.3 71,44.636 70.123,43.76 69.635,43.76 64.565,38.69 50.645,38.69 47.721,35.766 ; U1.56 46.5,34.544 47.721,35.765
  Bottom Layer w0.2: J5.3@70.926,47.25 J5.3
M0_PWM: J5.6 U1.70 | length 33.4
  Top Layer w0.2: U1.70 39.5,34.443 42.61,37.553 42.61,38.119 42.961,38.47 43.407,38.47 44.273,39.336 45.634,39.336 48.11,41.812 v1(48.11,42.47)
  Bottom Layer w0.2: v1(48.11,42.47) 48.169,42.47 48.589,42.89 52.206,42.89 52.521,43.205 65.685,43.205 J5.6
M1_DIR1: J7.4 U1.62 | length 18
  Top Layer w0.2: U1.62 43.5,34.939 44.265,35.704 ; 44.267,35.704 45.321,36.759 ; 45.321,36.76 49.651,41.09 51.167,41.09 53.477,43.4 54.059,43.4 55.484,44.825 55.758,44.825 J7.4@56.04,44.543
M1_DIR2: J7.5 U1.63 | length 19.7
  Top Layer w0.2: U1.63 43,35.005 44.1,36.104 ; 44.101,36.104 44.921,36.925 ; 44.921,36.926 49.485,41.49 51.001,41.49 53.311,43.8 53.894,43.8 54.77,44.676 J7.5
M1_ENCA: J7.7 U1.66 | length 19.7
  Top Layer w0.2: U1.66 41.5,34.746 44.21,37.456 44.21,38.142 44.563,38.495 45.924,38.495 49.32,41.89 50.836,41.89 52.23,43.284 J7.7
M1_ENCB: J7.8 U1.67 | length 16.8
  Top Layer w0.2: U1.67 41,34.811 43.81,37.621 43.81,38.307 44.397,38.895 45.758,38.895 49.154,42.29 50.67,42.29 50.96,42.58 J7.8
M1_FAULT: J7.3 LED5.C U1.61 | length 63.5
  Top Layer w0.2: LED5.C 18.658,49.075 27.92,49.075 28.355,48.64 42.785,48.64 43.185,48.24 55.164,48.24 56.114,47.29 J7.3 57.31,44.676 56.434,43.8 55.025,43.8 54.225,43 53.643,43 51.333,40.69 49.817,40.69 45.721,36.594 ; U1.61@44.016,33.741 U1.61 44,34.873 44.431,35.304 ; 44.432,35.304 45.721,36.593
M1_PWM: J7.6 U1.73 | length 25.6
  Top Layer w0.2: U1.73 38,34.392 37.5,34.892 37.5,41.914 38.996,43.41 v1(48.26,43.41)
  Bottom Layer w0.2: v1(48.26,43.41) 52.16,43.41 J7.6
M2_DIR1: J8.4 U1.8 | length 27.4
  Top Layer w0.2: U1.8 40.5,18.876 40.4,18.976 40.4,30.911 40.702,31.213 v1(40.702,31.327)
  Bottom Layer w0.2: v1(40.702,31.327) 40.702,31.653 40.752,31.703 40.752,32.2 40.552,32.4 40.552,42.992 J8.4
M2_DIR2: J8.5 U1.7 | length 29.4
  Top Layer w0.2: U1.7 40,31.076 40.1,31.176 40.1,31.674 40.075,31.699 40.075,31.875 v1(40.152,31.952)
  Bottom Layer w0.2: v1(40.152,31.952) 40.152,43.788 41,44.636 J8.5
M2_ENCA: J8.7 U1.6 | length 29.8
  Top Layer w0.2: U1.6 39.5,18.925 39.58,19.005 39.58,31.345 v1(39.5,31.425)
  Bottom Layer w0.2: J8.7 38.46,44.636 39.336,43.76 39.39,43.76 39.752,43.398 39.752,32.4 39.552,32.2 39.552,31.703 39.665,31.59 v1(39.5,31.425)
M2_ENCB: J8.8 U1.76 | length 17.6
  Top Layer w0.2: U1.76 35.876,32 36.106,31.77 37.67,31.77 v1(37.71,31.73)
  Bottom Layer w0.2: J8.8 37.805,44.71 39.352,43.163 39.352,33.102 37.98,31.73 v1(37.71,31.73)
M2_FAULT: J8.3 LED6.C U1.9 | length 57.6
  Top Layer w0.2: LED6.C 19.807,48.64 27.789,48.64 28.189,48.24 42.55,48.24 J8.3 ; U1.9 41,18.942 40.8,19.142 40.8,30.45 41.375,31.025 v1(41.375,31.925)
  Bottom Layer w0.2: v1(41.375,31.925) 41.152,32.148 41.152,32.366 40.952,32.566 40.952,42.826 41.886,43.76 42.664,43.76 43.54,44.636 J8.3
M2_PWM: J8.6 U1.74 | length 12.3
  Top Layer w0.2: U1.74 37.5,34.326 37,34.826 37,41.98 J8.6
M3_DIR1: J10.4 U1.78 | length 17.2
  Top Layer w0.2: J10.4 29.37,43.88 29.37,36.128 34.498,31 U1.78 U1.78@35.45,31
M3_DIR2: J10.5 U1.79 | length 20.8
  Top Layer w0.2: J10.5 27.31,47.21 27.31,44.596 28.97,42.936 28.97,35.962 34.432,30.5 U1.79 U1.79@35.45,30.5
M3_ENCA: J10.7 U1.80 | length 22.4
  Top Layer w0.2: J10.7 24.764,47.29 26.91,45.144 26.91,44.431 28.57,42.771 28.57,35.797 34.367,30 U1.80 U1.80@35.45,30
M3_ENCB: J10.8 U1.81 | length 22.4
  Top Layer w0.2: J10.8 24.616,44.75 25.566,43.8 26.925,43.8 28.17,42.555 28.17,35.631 34.301,29.5 U1.81@35.45,29.5
M3_FAULT: J10.3 LED7.C U1.77 | length 29.6
  Top Layer w0.2: LED7.C 20.99,48.24 27.624,48.24 28.574,47.29 J10.3 29.77,36.294 34.564,31.5 U1.77 U1.77@35.45,31.5
M3_PWM: J10.6 U1.75 | length 18.3
  Top Layer w0.2: v1(30.57,40.14) 30.17,39.74 30.17,36.51 32.955,33.725 U1.75
  Bottom Layer w0.2: J10.6@25.96,44.715 J10.6 v1(30.57,40.14)
NetC4_2: C4.2 D1.1 D2.1 U2.3 | length 7.8
  Bottom Layer w0.6: U2.3 72,14.9 C4.2 73,13.9 D2.1 D1.1
NetC11_1: C11.1 U1.23 X1.P$1 | length 6.5
  Top Layer w0.2: U1.23 48,14.615 X1.P$1 50.177,13.858 C11.1
NetC12_1: C12.1 U1.22 X1.P$3 | length 8.8
  Top Layer w0.2: C12.1 46.573,11.172 X1.P$3 45.638,13.117 45.638,14.3 47.5,16.162 U1.22
NetC15_2: C15.2 L1.1 U1.10 U1.12 | length 5.4
  Top Layer w0.2: U1.10 41.5,19.195 ; v1(41.5,19.96) 41.5,19.2 42.393,19.2 42.5,19.093 U1.12
  Bottom Layer w0.2: C15.2 41.3,19.76 v1(41.5,19.96)
NetF1_1: F1.1 J1.1 | length 6.3
  Top Layer w0.6: v3(77.305,11.465) 77.325,11.485 J1.1
  Bottom Layer w0.6: v3(77.305,11.465) 77.305,6.395 F1.1
NetJ1_2: J1.2 R8.2 | length 6.8
  Top Layer w0.2: R8.2 75.145,14.38 76.325,13.2 J1.2
NetJ1_3: J1.3 R11.2 | length 7.3
  Top Layer w0.2: R11.2 73.81,16.44 76.25,14 J1.3
NetJ2_1: J2.1 R10.1 U1.47 | length 36.5
  Top Layer w0.2: U1.47 53.44,30.5 v1(53.525,30.415) ; v1(55.995,17.22) 56.081,17.22 56.811,16.49 58.704,16.49 60.65,14.544 60.65,13.665 61.3,13.015 R10.1 58.5,9.5 J2.1
  Bottom Layer w0.2: 53.235,30.125 53.235,28.303 54.755,26.783 54.755,26.52 54.755,19.089 54.985,18.859 54.985,18.23 v1(55.995,17.22) ; 53.235,30.125 v1(53.525,30.415)
NetJ2_2: J2.2 R9.1 U1.46 | length 36
  Top Layer w0.2: U1.46 51.457,30 51.689,29.768 54.014,29.768 v1(54.299,30.053) ; v1(57.06,17.09) 57.27,17.3 58.46,17.3 61.3,14.46 R9.1 61.3,13.581 61.95,12.931 61.95,11.55 61.7,11.3 60.866,11.3 58.9,9.334 58.9,5.91 J2.2
  Bottom Layer w0.2: v1(54.299,30.053) 53.635,29.389 53.635,28.835 53.635,28.469 55.155,26.949 55.155,26.895 55.155,19.255 55.385,19.025 55.385,18.396 55.961,17.82 56.244,17.82 56.974,17.09 v1(57.06,17.09)
NetJ11_1: J11.1 R19.2 U3.15 | length 15.6
  Top Layer w0.2: J11.1 5.87,32.87 8.864,32.87 9.25,32.484 9.25,31.826 9.676,31.4 9.676,31.024 R19.2 10.8,29.9 16.351,29.9 17.035,29.9 17.685,29.25 U3.15
NetJ11_2: J11.2 R20.1 U3.14 | length 17.6
  Top Layer w0.2: J11.2 9.03,33.27 R20.1 10.75,31.55 10.75,30.625 11.075,30.3 16.186,30.3 17.201,30.3 17.751,29.75 U3.14
NetJ11_3: J11.3 R21.2 U3.12 | length 19
  Top Layer w0.2: J11.3 5,36.625 6.1,37.725 8.975,37.725 R21.2 10.575,37.275 11.226,37.275 17.751,30.75 U3.12
NetJ11_4: J11.4 R22.1 U3.11 | length 19.6
  Top Layer w0.2: J11.4 3.61,35.81 5.925,38.125 9.141,38.125 9.316,38.3 R22.1 10.825,38.3 17.875,31.25 U3.11
NetJ12_2: J12.2 U4.14 | length 11
  Top Layer w0.4: U4.14@73.475,33.905 75.905,33.905 J12.2
NetJ13_3: J13.3 U4.13 | length 10
  Top Layer w0.4: U4.13@73.475,32.635 78.61,32.635 79.465,31.78 79.895,31.78 82,29.675 J13.3
NetJ13_4: J13.4 U4.12 | length 6.2
  Top Layer w0.4: U4.12@73.475,31.365 78.825,31.365 J13.4
NetJ13_5: J13.5 U4.11 | length 9.8
  Top Layer w0.4: U4.11@73.475,30.095 73.57,30 v2(77.75,30)
  Bottom Layer w0.4: v2(77.75,30) 78.515,30 78.835,29.68 79.895,29.68 82,31.785 J13.5
NetLED1_2: LED1.2 R1.1 | length 4.4
  Top Layer w0.4: LED1.2 11.7,4.3 11.7,5.334 11.15,5.884 R1.1
NetLED1_3: LED1.3 R2.2 | length 2
  Top Layer w0.4: R2.2 7.25,5.05 LED1.3
NetLED1_4: LED1.4 R3.1 | length 4.4
  Top Layer w0.4: LED1.4 9.2,4.9 R3.1
NetLED2_2: LED2.2 R4.1 | length 4.4
  Top Layer w0.4: LED2.2 17.7,4.3 17.7,5.334 17,6.034 R4.1
NetLED2_3: LED2.3 R5.2 | length 2.1
  Top Layer w0.4: R5.2 13.1,5.2 LED2.3
NetLED2_4: LED2.4 R6.1 | length 4.3
  Top Layer w0.4: LED2.4 15.05,4.75 R6.1
NetLED3_A: LED3.A R12.2 | length 2.1
  Top Layer w0.4: LED3.A 15.25,45.25 R12.2
NetLED4_C: LED4.C R13.1 | length 7.9
  Top Layer w0.2: LED4.C 69.6,4.65 R13.1
NetLED5_A: LED5.A R14.2 | length 2.1
  Top Layer w0.4: LED5.A 16.917,45.167 R14.2
NetLED6_A: LED6.A R15.2 | length 2.1
  Top Layer w0.4: LED6.A 18.583,45.083 R15.2
NetLED7_A: LED7.A R16.2 | length 2.2
  Top Layer w0.4: LED7.A 20.25,45 R16.2
NetQ1_3: Q1.3 R7.2 | length 2.9
  Top Layer w0.2: R7.2 71.4,18.9 Q1.3
NetR18_1: R18.1 U1.53 | length 1.4
  Top Layer w0.2: U1.53 v1(48,35.025)
  Bottom Layer w0.2: R18.1 v1(48,35.025)
NetR23_1: R23.1 U3.20 | length 1
  Top Layer w0.2: v1(18.1,25.8) U3.20
NetR24_2: R24.2 U3.32 | length 1.3
  Top Layer w0.2: U3.32 23.95,27.2 v1(24.6,27.2)
  Bottom Layer w0.2: R24.2 24.5,27.2 24.55,27.25 R24.2@24.6,27.2
NetU1_39: U1.39 U3.22 | length 38.5
  Top Layer w0.2: U3.22 19.25,22.471 20.821,20.9 v1(21.235,20.9) ; v1(47.795,27.02) 48.789,27.02 49.309,26.5 U1.39
  Bottom Layer w0.2: v1(21.235,20.9) 22.16,20.9 22.66,21.4 23.595,21.4 24.595,22.4 29.708,22.4 31.808,24.5 44.951,24.5 47.471,27.02 v1(47.795,27.02)
NetU1_40: U1.40 U3.21 | length 40.5
  Top Layer w0.2: U3.21 18.75,22.405 20.89,20.265 v1(22.2,20.265) ; v1(48.505,27.65) 48.725,27.65 49.375,27 U1.40
  Bottom Layer w0.2: v1(22.2,20.265) 22.935,21 23.761,21 24.761,22 29.873,22 31.973,24.1 45.116,24.1 46.567,25.551 46.806,25.79 47.354,26.338 48.174,26.338 48.505,26.669 v1(48.505,27.65)
NetU1_43: U1.43 X3.P$1 | length 33.8
  Top Layer w0.2: X3.P$1@24.91,19.84 24.926,19.856 v1(24.926,20.915) ; v1(46.96,24.89) 46.25,25.6 46.25,28.349 47.251,29.35 49.095,29.35 49.945,28.5 U1.43
  Bottom Layer w0.2: v1(24.926,20.915) 25.475,20.915 26.16,21.6 30.039,21.6 32.139,23.7 45.282,23.7 46.472,24.89 v1(46.96,24.89)
NetU1_44: U1.44 U3.23 | length 39.4
  Top Layer w0.2: U3.23 19.75,22.536 20.621,21.665 22.045,21.665 v1(22.075,21.695) ; v1(48.75,30) 49.124,30 50.109,29.015 50.71,29.015 U1.44
  Bottom Layer w0.2: v1(22.075,21.695) 22.18,21.8 23.399,21.8 23.85,22.251 23.85,22.255 24.395,22.8 29.542,22.8 31.642,24.9 44.785,24.9 48.25,28.365 48.25,29.5 v1(48.75,30)
NetU1_86: U1.86 U3.24 | length 20.8
  Top Layer w0.2: U3.24 20.25,22.705 20.69,22.265 v1(21.205,22.265) ; v1(33.75,27.25) 34,27 U1.86
  Bottom Layer w0.2: v1(21.205,22.265) 21.325,22.385 22.134,22.385 22.444,22.695 22.596,22.695 23.001,23.1 23.284,23.1 23.784,23.6 29.211,23.6 31.911,26.3 32.79,26.3 33.74,27.25 v1(33.75,27.25)
NetU1_87: U1.87 U3.25 | length 19.3
  Top Layer w0.2: U3.25 20.75,25.767 20.675,25.692 20.675,23.36 20.94,23.095 v1(21.995,23.095) ; v1(32.5,27) 33,26.5 U1.87
  Bottom Layer w0.2: v1(21.995,23.095) 22.431,23.095 22.836,23.5 23.119,23.5 23.619,24 29.045,24 32.045,27 v1(32.5,27)
NetU1_89: U1.89 U3.34 | length 14.8
  Top Layer w0.2: U3.34 24.35,28.25 24.6,28.5 v1(28.575,28.5) ; v1(34.25,25.5) 35.225,25.5 35.25,25.475 U1.89
  Bottom Layer w0.2: v1(28.575,28.5) 30.606,28.5 30.976,28.87 33.12,28.87 34.45,27.54 34.45,25.5 34.35,25.4 34.275,25.475 34.3,25.5 v1(34.25,25.5)
NetU1_90: U1.90 U3.37 | length 13.8
  Top Layer w0.2: U3.37 28.901,29.75 30.625,28.026 30.625,28.021 30.976,27.67 30.981,27.67 31.8,26.851 31.8,26.21 33.11,24.9 34.498,24.9 34.599,25 U1.90
NetU1_91: U1.91 U3.36 | length 13.7
  Top Layer w0.2: U3.36 28.836,29.25 30.225,27.861 30.225,27.856 30.811,27.27 30.816,27.27 31.4,26.686 31.4,26.044 32.944,24.5 34.664,24.5 U1.91
NetU1_92: U1.92 U3.33 | length 13.4
  Top Layer w0.2: U3.33 23.975,27.825 29.695,27.825 29.825,27.695 29.825,27.69 30.645,26.87 30.65,26.87 31,26.52 31,25.879 32.879,24 U1.92
NetU1_93: U1.93 U3.3 | length 19.2
  Top Layer w0.2: U3.3 22.25,32.425 22.325,32.5 24.834,32.5 25.835,31.499 v1(25.835,30.36) ; v1(27.245,26.81) 27.69,26.81 28.08,26.42 29.134,26.42 29.334,26.22 30.093,26.22 32.813,23.5 U1.93
  Bottom Layer w0.2: v1(25.835,30.36) 26.476,29.719 26.476,28.448 27.245,27.679 v1(27.245,26.81)
NetU1_94: U1.94 U3.5 | length 22
  Top Layer w0.2: U3.5 21.25,32.556 21.994,33.3 25.176,33.3 27.9,30.576 v1@27.9,30.425 ; v1(28.885,25.82) 29.927,25.82 32.747,23 U1.94
  Bottom Layer w0.2: v1@27.9,30.36 27.276,29.736 27.276,28.779 28.245,27.811 28.245,26.375 28.8,25.82 v1(28.885,25.82)
  other v1: 27.89,30.36
NetU1_95: U1.95 U3.4 | length 22.2
  Top Layer w0.2: U3.4 21.75,32.491 22.159,32.9 25,32.9 26.825,31.075 v1@26.825,30.36 ; v1(27.075,25.825) 28.025,25.825 28.64,25.21 29.972,25.21 32.682,22.5 U1.95
  Bottom Layer w0.2: v1@26.876,30.36 26.876,28.614 27.845,27.645 27.845,26.561 27.494,26.21 27.46,26.21 v1(27.075,25.825)
  other v1: 26.862,30.36
P1.19: J4.3 U1.38 | length 33.7
  Top Layer w0.2: v1(44.626,20.245) 44.626,20.435 45.62,21.429 45.62,22.512 49.108,26 U1.38
  Bottom Layer w0.2: J4.3 35.5,5.114 36.376,5.99 37.785,5.99 38.585,6.79 39.994,6.79 40.794,7.59 41.572,7.59 45.62,11.638 45.62,18.388 44.626,19.382 v1(44.626,20.245)
P1.20: J4.4 U1.37 | length 29.5
  Top Layer w0.2: v1(45.226,19.63) 45.226,20.47 46.02,21.264 46.02,22.346 49.174,25.5 U1.37
  Bottom Layer w0.2: J4.4 37.401,5.04 38.751,6.39 40.159,6.39 40.959,7.19 41.737,7.19 46.02,11.473 46.02,18.682 45.226,19.476 v1(45.226,19.63)
P1.21: J4.5 U1.36 | length 30.5
  Top Layer w0.2: v1(45.845,20.24) 45.845,20.515 46.42,21.09 46.42,22.181 49.239,25 U1.36
  Bottom Layer w0.2: J4.5 38.04,5.114 38.916,5.99 40.325,5.99 41.125,6.79 41.903,6.79 46.42,11.307 46.42,18.865 46.195,19.09 46.178,19.09 45.827,19.441 45.827,19.938 45.865,19.977 45.865,20.26 v1(45.845,20.24)
P1.22: J4.6 U1.35 | length 26.2
  Top Layer w0.2: v1(46.427,19.69) 46.445,19.708 46.445,20.489 46.82,20.864 46.82,22.015 49.305,24.5 U1.35
  Bottom Layer w0.2: J4.6 39.941,5.04 41.291,6.39 42.069,6.39 46.82,11.141 46.82,19.031 46.62,19.231 46.62,19.497 v1(46.427,19.69)
P1.23: J4.7 U1.34 | length 27.1
  Top Layer w0.2: v1(47.045,20.24) 47.22,20.415 47.22,21.849 49.371,24 U1.34
  Bottom Layer w0.2: J4.7 40.58,5.114 41.456,5.99 42.234,5.99 47.22,10.976 47.22,19.196 47.02,19.396 47.02,19.435 47.027,19.441 47.027,19.938 47.02,19.945 47.02,20.215 v1(47.045,20.24)
P1.24: J4.8 U1.33 | length 22.9
  Top Layer w0.2: v1(47.627,19.645) 47.645,19.663 47.645,20.489 47.62,20.514 47.62,21.684 49.436,23.5 U1.33
  Bottom Layer w0.2: J4.8 47.627,10.817 v1(47.627,19.645)
P2.11: J3.5 U1.52 | length 48.6
  Top Layer w0.2: v1(34.47,16.81) 34.405,16.875 33.436,16.875 33.085,17.226 33.085,17.665 33.495,18.075 34.376,18.075 34.831,18.53 35.324,18.53 36.394,19.6 36.711,19.6 37.561,20.45 38.499,20.45 38.78,20.731 38.78,29.895 v1(38.58,30.095) ; v1(42.48,31.07) 43.375,31.965 48.214,31.965 48.565,32.316 48.565,32.814 48.5,32.879 U1.52
  Bottom Layer w0.2: J3.5 26.814,2.5 31.28,6.966 31.28,10.624 34.1,13.444 34.1,16.44 v1(34.47,16.81) ; v1(38.58,30.095) 39.31,30.825 40.355,30.825 40.453,30.727 40.951,30.727 41.294,31.07 v1(42.48,31.07)
P2.12: J6.3 U1.51 | length 37.9
  Top Layer w0.2: U1.51 49.585,33.725 50.485,32.825 v1(53.03,32.825) ; v1(54.16,8.865) 54.585,9.29 v1(54.585,17.735)
  Bottom Layer w0.2: J6.3 49.573,2.5 51.72,4.646 51.72,6.425 v1(54.16,8.865) ; v1(53.03,32.825) 52.857,32.652 53.035,32.474 53.035,31.976 52.835,31.776 52.835,28.138 54.355,26.618 54.355,18.924 54.585,18.694 54.585,17.845 54.53,17.79 v1(54.585,17.735)
P2.13: J6.4 U1.50 | length 31
  Top Layer w0.2: U1.50 52.21,32 v1(52.435,32.225) ; v1(53.965,9.93) 53.985,9.95 v1(53.985,18.445)
  Bottom Layer w0.2: J6.4 50.77,6.735 v1(53.965,9.93) ; v1(52.435,32.225) 52.435,27.972 53.955,26.452 53.955,18.475 v1(53.985,18.445)
P3.25: J6.6 U1.27 | length 17
  Top Layer w0.2: U1.27 51.569,20.5 52,20.069 52,19.786 53.31,18.476 J6.6
P3.26: J6.5 U1.26 | length 19.2
  Top Layer w0.2: U1.26 51.503,20 51.6,19.903 51.6,19.62 52.91,18.31 52.91,5.984 52.36,5.434 52.36,2.82 J6.5
PFB: C19.2 C20.2 C21.1 C22.1 U3.16 U3.19 U3.30 | length 20.8
  Top Layer w0.2: v1(16.6,29.3) 17.069,29.3 17.619,28.75 U3.16 ; U3.30 23.287,26.063 v1(23.287,25.505)
  Top Layer w0.3: v1(16.55,27.25) U3.19
  Bottom Layer w0.2: C21.1 22.7,26.1 23.287,25.513 v1(23.287,25.505)
  Bottom Layer w0.3: C22.1 15.5,26.2 C19.2@16.262,26.962 ; v1(16.6,29.3) v1@16.625,29.3 ; C20.2 18,29.3 v1@16.625,29.3 ; v1(23.287,25.505) 22.225,25.505 21.925,25.206 21.925,25.174 21.544,24.793 17.987,24.793 17.45,25.33 17.45,25.775 C19.2 C19.2@16.262,26.962 ; C19.2@16.262,26.962 v1(16.55,27.25) 16.25,27.55 16.25,28.925 v1@16.625,29.3
PWM0: U1.68 U4.3 | length 33
  Top Layer w0.2: U1.68 40.5,34.877 43.21,37.587 v1(43.21,37.87) ; v1(48.92,35.88) 48.92,34.965 49.98,33.905 U4.3@68.525,33.905
  Bottom Layer w0.2: v1(43.21,37.87) 43.21,37.422 44.752,35.88 v1(48.92,35.88)
PWM1: J3.6 U1.69 | length 36
  Top Layer w0.2: v1(33.685,17.475) 34.341,17.475 34.996,18.13 35.49,18.13 36.56,19.2 36.876,19.2 37.726,20.05 38.665,20.05 39.18,20.565 39.18,30.896 38.9,31.176 38.9,31.674 40,32.774 U1.69
  Bottom Layer w0.2: J3.6 28.789,5.04 30.88,7.131 30.88,10.79 33.7,13.61 33.685,13.625 v1(33.685,17.475)
RTCX1: C13.1 U1.16 X2.X2 | length 6.4
  Top Layer w0.2: C13.1 40.885,15.125 X2.X2 42.565,15.125 44.12,16.68 44.12,17.084 44.425,17.389 44.425,17.63 44.5,17.63 U1.16
RTCX2: C14.1 U1.18 X2.X1 | length 9.6
  Top Layer w0.2: C14.1 40.885,12.625 X2.X1 43.13,12.625 43.75,13.245 43.75,15 45.5,16.75 U1.18
TGT_RESET: C9.1 J9.6 R17.1 SW1.P$1 U1.17 | length 114.6
  Top Layer w0.2: J9.6 5.425,21.35 6.295,20.48 17.246,20.48 19.806,17.92 20.635,17.92 v1(20.87,18.155) ; v1(39.8,7.452) 40.048,7.7 49.331,7.7 51.718,10.087 v1(52.163,10.087) ; v1(44.72,16.835) 45,17.115 U1.17 ; v1(59.725,3.445) 59.97,3.69 63.06,3.69 65.85,0.9 74.1,0.9 SW1.P$1 75.935,3 71.875,7.06 71.875,9.385 C9.1 R17.1
  Bottom Layer w0.2: v1(20.87,18.155) 21.19,18.475 35.176,18.475 37.651,16 43.885,16 v1(44.72,16.835) 45.22,16.335 45.22,11.804 41.406,7.99 40.628,7.99 40.09,7.452 v1(39.8,7.452) ; v1(52.163,10.087) 53.274,10.087 53.716,10.53 54.214,10.53 58.82,5.924 58.82,4.35 v1(59.725,3.445)
TGT_RX: J9.4 U1.99 | length 36
  Top Layer w0.2: J9.4 5.075,18.81 5.945,19.68 16.914,19.68 19.958,16.636 25.552,16.636 29.416,20.5 U1.99
TGT_SCON: Q1.1 U1.64 | length 38.3
  Top Layer w0.2: U1.64 42.5,35.07 44.811,37.382 v1(44.811,37.895) ; v1(66.62,21.965) 69.215,21.965 Q1.1
  Bottom Layer w0.2: v1(44.811,37.895) 44.72,37.895 44.72,36.645 44.885,36.48 50.224,36.48 54.91,31.794 54.91,30.15 63.095,21.965 v1(66.62,21.965)
TGT_SWCLK: J9.3 U1.5 | length 37.9
  Top Layer w0.2: J9.3 6.74,19.28 16.749,19.28 19.746,16.283 28.591,16.283 28.838,16.53 29.269,16.53 29.999,15.8 37.42,15.8 39,17.38 U1.5
TGT_SWDIO: J9.7 U1.3 | length 37.1
  Top Layer w0.2: J9.7 6.74,20.88 17.411,20.88 19.781,18.51 20.376,18.51 20.232,18.655 v1(20.23,18.655) ; v1(37.5,17) 38,17.5 U1.3
  Bottom Layer w0.2: v1(20.23,18.655) 20.23,18.55 20.416,18.55 20.741,18.875 35.625,18.875 v1(37.5,17)
TGT_SWO: J9.2 U1.1 | length 39.1
  Top Layer w0.2: J9.2 5.074,16.27 5.95,17.146 5.95,17.9 6.93,18.88 16.583,18.88 19.533,15.93 v1(29.02,15.93) ; v1(35.245,17.53) 36.865,17.53 37,17.665 U1.1
  Bottom Layer w0.2: v1(29.02,15.93) 31.165,18.075 33.934,18.075 34.479,17.53 v1(35.245,17.53)
TGT_TX: J9.5 U1.98 | length 33.2
  Top Layer w0.2: J9.5 17.08,20.08 20.171,16.989 25.339,16.989 29.35,21 U1.98
VBAT: J14.1 U1.19 | length 27.4
  Top Layer w0.2: J14.1 25.975,11.775 43.259,11.775 44.422,12.938 44.438,12.938 44.438,14.829 46,16.391 U1.19
VBUS_IF: D2.2 J9.1 | length 82.2
  Top Layer w0.8: v4(12.28,1.405) 12.435,1.25 61.77,1.25 62.7,2.18 v4(62.7,2.89)
  Bottom Layer w0.8: J9.1 5,7.685 11.28,1.405 v4(12.28,1.405) ; v4(62.7,2.89) 65.62,5.81 71.325,5.81 73,7.485 D2.2
VBUS_TGT: D1.2 F1.2 | length 2.8
  Bottom Layer w0.6: F1.2 75,6.7 D1.2
pads on no net: J1.0 J1.4 J2.drill J3.drill J4.drill J5.drill J6.drill J7.drill J8.drill J9.drill J10.drill J11.drill J13.drill U1.2 U1.4 U1.14 U1.100 U3.2 U3.6 U3.7 U3.8 U3.9 U3.10 U3.27 U3.31 U3.35 U3.38 U3.39

## Polygon pours and split planes (outlines as drawn)
GND on Bottom Layer "Bottom GND plane" (solid, remove dead copper, pour order 0): 6.5,50 77.5,50 77.5,45 75,42.5 71.25,42.5 68.75,40 68.75,37.75 68.75,26.25 70,25 73.75,21.25 85,21.25 85,6.5 80.5,6.5 78.5,4.5 78.5,0 6.5,0 6.5,4.5 4.5,6.5 0,6.5 0,43.5 4.5,43.5 6.5,45.5
GND on Top Layer "Top GND plane" (solid, remove dead copper, pour order 2): 0,43.5 4.5,43.5 6.5,45.5 6.5,50 77.5,50 77.5,45 75,42.5 71.25,42.5 68.75,40 68.75,26.25 73.75,21.25 85,21.25 85,6.5 80.5,6.5 78.5,4.5 78.5,0 6.5,0 6.5,4.5 4.5,6.5 0,6.5

## Keep-outs
Keep-Out Layer:
  the board outline again, w0.2

## Silkscreen, mask and mechanical layers (free items; w line width, h text height)
Top Overlay:
  drawing of 27 lines, arcs and shapes, not listed
  text "GND" at 80.01,41.402 h1 r90
  text "SIG" at 82.55,41.402 h1 r90
  text "mbed MAINBOARD v1.0" at 42.9,38.625 h1
Mechanical 16:
  drawing of 1874 lines, arcs and shapes, not listed
  text "1" at -84.286,115.509 h1.78
  text "2" at -11.642,115.509 h1.78
  text "3" at 61.51,115.509 h1.78
  text "4" at 134.408,115.509 h1.78
  text "A" at -118.627,92.497 h1.78
  text "A" at 168.393,92.497 h1.78
  text "B" at -118.627,44.44 h1.78
  text "B" at 168.15,43.725 h1.78
  text "C" at -118.627,-4.074 h1.78
  text "C" at 168.393,-4.074 h1.78
  text "ENGINEER:" at 53.458,-41.082 h1.14
  text "TITLE:" at 91.558,-41.082 h1.14
  text "PCB DESIGNER:" at 53.458,-48.575 h1.14
  text "D" at -118.627,-52.08 h1.78
  text "D" at 168.393,-52.08 h1.78
  text "DATE:" at 53.458,-56.322 h1.14
  text "PART NO.:" at 91.558,-56.322 h1.14
  text "REV:" at 144.898,-56.322 h1.14
  text "Altium Limited" at 20.438,-58.862 h1.78
  text ".PRINT_DATE" at 54.728,-59.37 h1.78
  text "12a Rodborough Rd" at 20.438,-61.402 h1.78
  text "Frenchs Forest" at 20.438,-63.942 h1.78
  text "FILE NAME:" at 53.458,-63.942 h1.14
  text "DWG NO:" at 91.558,-63.942 h1.14
  text "SCALE:" at 144.898,-63.942 h1.14
  text "NSW 2086" at 20.438,-66.482 h1.78
  text ".PCB_FILE_NAME_NO_PATH" at 54.728,-66.99 h1.78
  text "1" at -84.286,-72.451 h1.78
  text "2" at -11.642,-72.451 h1.78
  text "3" at 61.51,-72.451 h1.78
  text "4" at 134.408,-72.451 h1.78